# Altium PCB BreakoutBoard.PcbDoc
Units mil, origin at the board's own origin, x right, y up, seen from the top; angles counter-clockwise.
Board outline 1530 x 1110 mil, 2 copper layers (Top Layer, Bottom Layer); 13 components, 14 nets, 52 pads, 0 vias.
Unrouted connection lines stored in the file: 2.
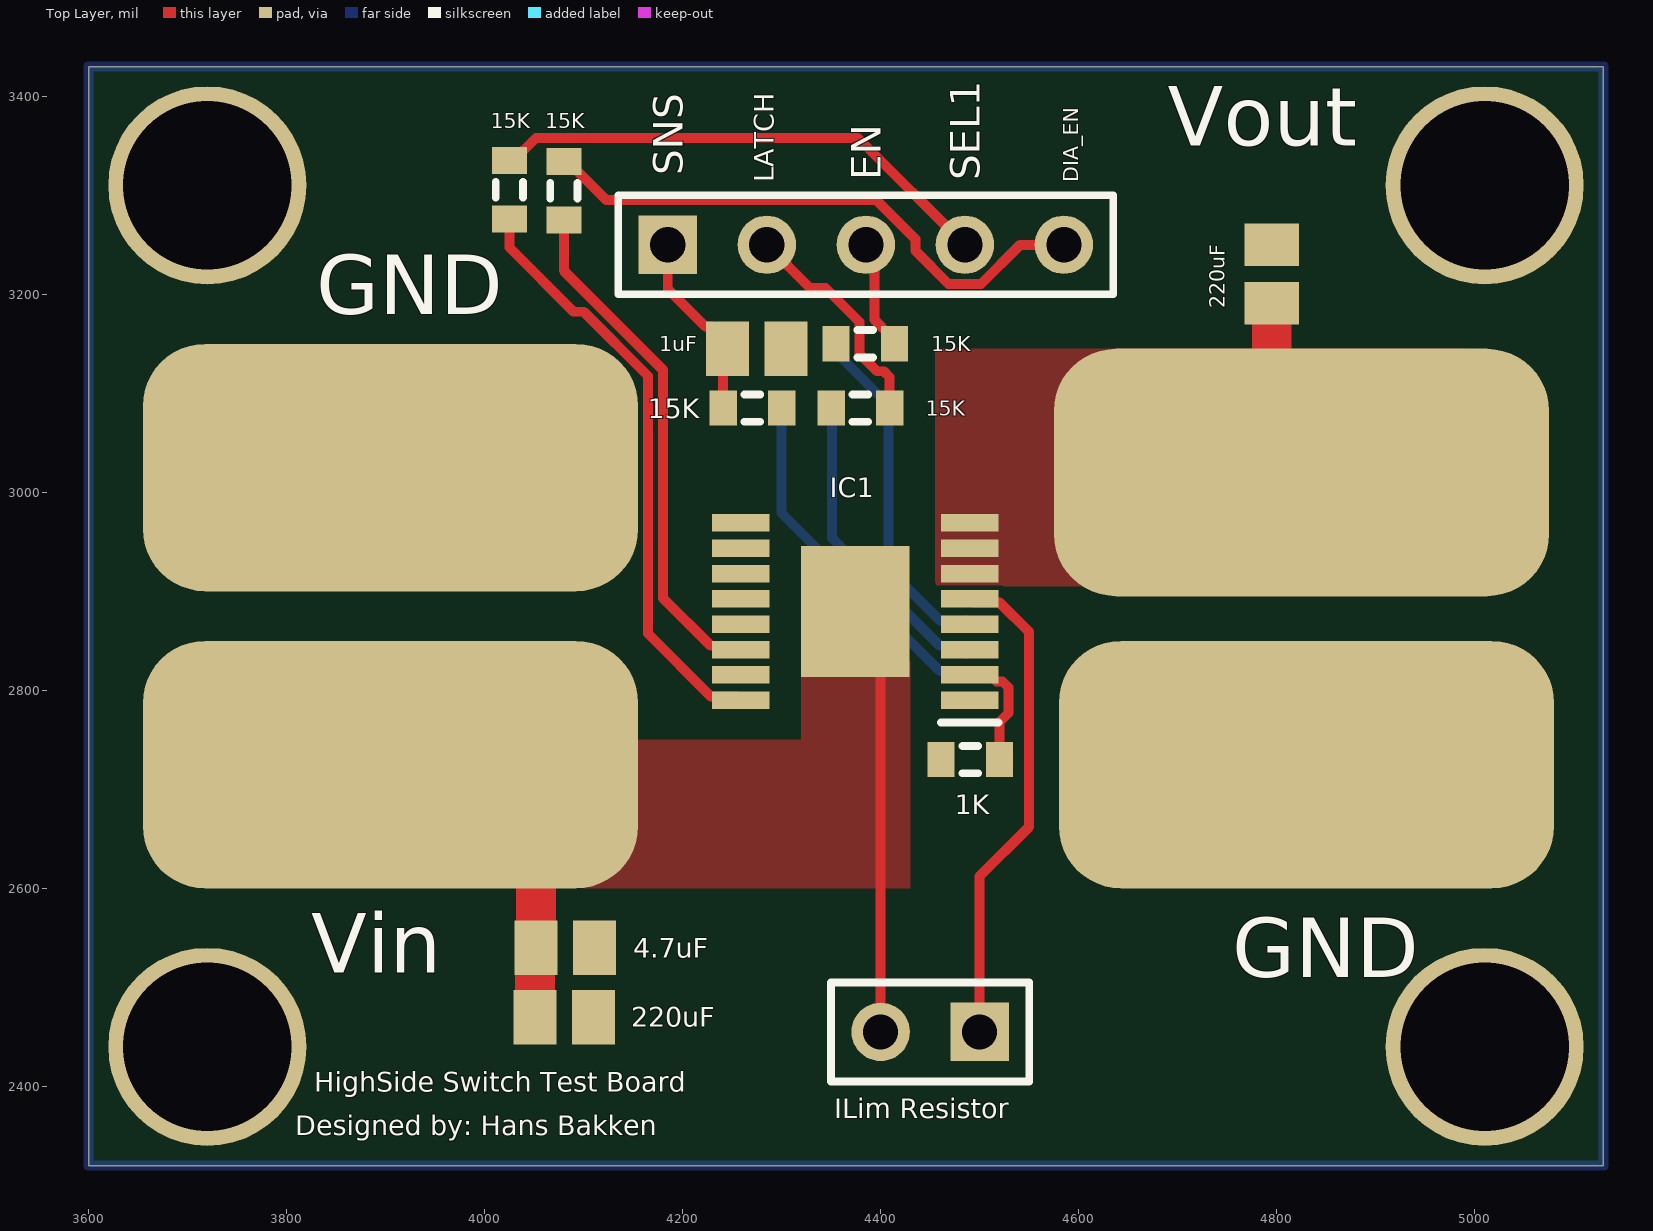
[diagram p0: Top Layer view]
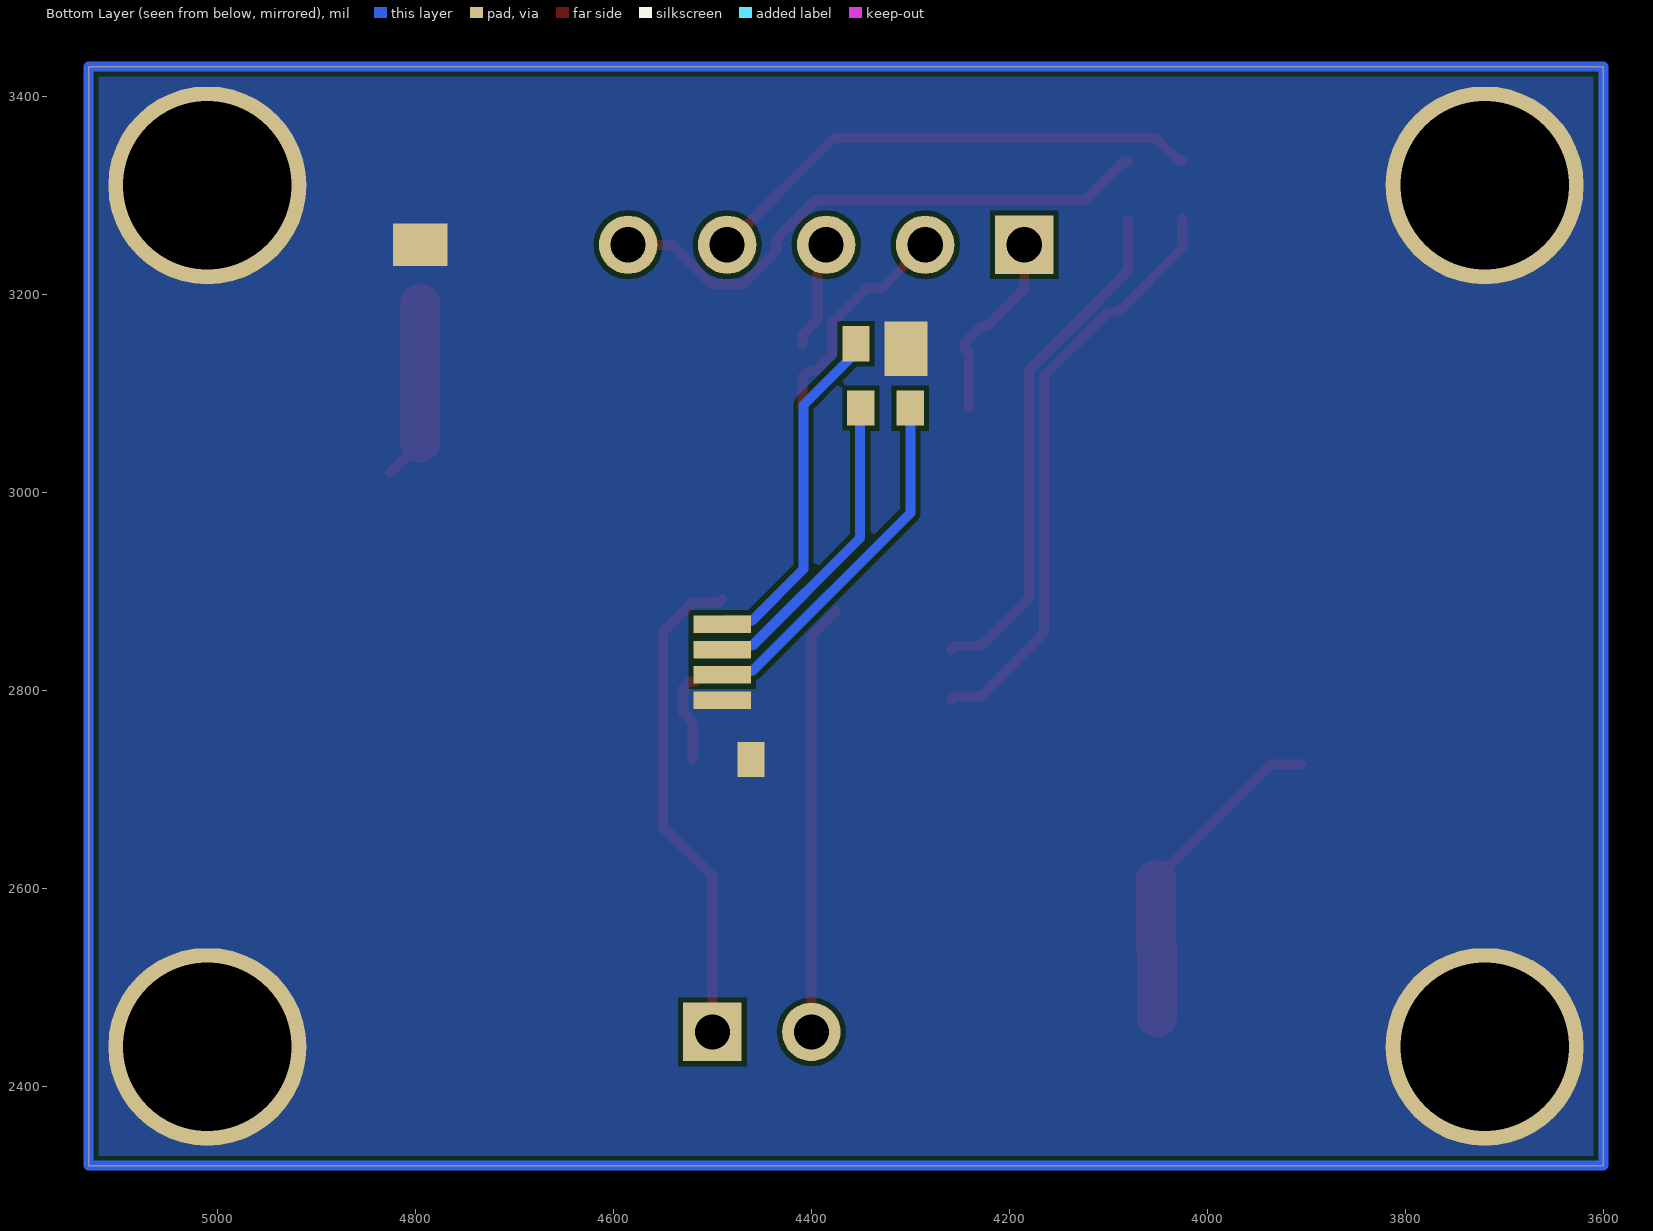
[diagram p1: Bottom Layer view, seen from below]

## Layer stack, top to bottom
Top Solder: solder mask 0.4, Solder Resist, Dk 3.5
Top Layer: signal copper 1.4
Dielectric 1: dielectric 12.6, FR-4, Dk 4.8
Bottom Layer: signal copper 1.4
Bottom Solder: solder mask 0.4, Solder Resist, Dk 3.5

## Board outline
3600,2320 3600,3430 5130,3430 5130,2320

## Design rules (kind name [scope] priority, off if disabled: settings)
Clearance [All] p1: gap=5 ignorepadtopadclearanceinfootprint=FALSE except(0: Arc-Hole Track-Hole SMDPad-Hole THPad-Hole Via-Hole Fill-Hole Poly-Hole Region-Hole Text-Hole)
DiffPairsRouting [All] p1: maxlimit=10 minlimit=5 mostfreqgap=10 toplayer_minwidth=5 toplayer_maxwidth=15 toplayer_prefwidth=15 bottomlayer_minwidth=5 bottomlayer_maxwidth=15 bottomlayer_prefwidth=15 maxuncoupledlength=500
PolygonConnect direct_2 [All vs IsNamedPolygon('VCC_L01_P004')] p1: thpad.connectstyle=Direct thpad.reliefconductorwidth=10 thpad.reliefentries=4 thpad.polygonreliefangle="90 Angle" thpad.airgapwidth=10 smdpad.connectstyle=Direct smdpad.reliefconductorwidth=10 smdpad.reliefentries=4 smdpad.polygonreliefangle="90 Angle" smdpad.airgapwidth=10 via.connectstyle=Relief via.reliefconductorwidth=10 via.reliefentries=4 via.polygonreliefangle="90 Angle" via.airgapwidth=10
PolygonConnect Direct_1 [All vs IsNamedPolygon('VOUT_L01_P003')] p2: thpad.connectstyle=Direct thpad.reliefconductorwidth=10 thpad.reliefentries=4 thpad.polygonreliefangle="90 Angle" thpad.airgapwidth=10 smdpad.connectstyle=Direct smdpad.reliefconductorwidth=10 smdpad.reliefentries=4 smdpad.polygonreliefangle="90 Angle" smdpad.airgapwidth=10 via.connectstyle=Relief via.reliefconductorwidth=10 via.reliefentries=4 via.polygonreliefangle="90 Angle" via.airgapwidth=10
PolygonConnect Direct [All vs IsNamedPolygon('VOUT_L01_P002')] p3: connectstyle=Direct reliefconductorwidth=10 reliefentries=4 polygonreliefangle="90 Angle" airgapwidth=10
PolygonConnect "Thick Connections" [All vs IsNamedPolygon('GND_L02_P001')] p4: connectstyle=Direct reliefconductorwidth=10 reliefentries=4 polygonreliefangle="90 Angle" airgapwidth=10
PolygonConnect PolygonConnect_1 [All vs IsNamedPolygon('GND_L02_P001')] p5: thpad.connectstyle=Relief thpad.reliefconductorwidth=10 thpad.reliefentries=4 thpad.polygonreliefangle="90 Angle" thpad.airgapwidth=0 smdpad.connectstyle=Relief smdpad.reliefconductorwidth=10 smdpad.reliefentries=4 smdpad.polygonreliefangle="90 Angle" smdpad.airgapwidth=0 via.connectstyle=Relief via.reliefconductorwidth=10 via.reliefentries=4 via.polygonreliefangle="90 Angle" via.airgapwidth=10
PolygonConnect y [All vs IsNamedPolygon('GND_L02_P001')] p6: thpad.connectstyle=Relief thpad.reliefconductorwidth=10 thpad.reliefentries=4 thpad.polygonreliefangle="90 Angle" thpad.airgapwidth=100 smdpad.connectstyle=Relief smdpad.reliefconductorwidth=10 smdpad.reliefentries=4 smdpad.polygonreliefangle="90 Angle" smdpad.airgapwidth=10 via.connectstyle=Relief via.reliefconductorwidth=10 via.reliefentries=4 via.polygonreliefangle="90 Angle" via.airgapwidth=10
PolygonConnect [All] p7: connectstyle=Relief reliefconductorwidth=10 reliefentries=4 polygonreliefangle="90 Angle" airgapwidth=10
RoutingVias [All] p1: holewidth=28 width=50 viastyle="Through Hole" minholewidth=28 minwidth=50 maxholewidth=28 maxwidth=50
SolderMaskExpansion [All] p1: expansion=4 istentingtop=FALSE
Width [All] p1: maxlimit=1000 minlimit=10 preferedwidth=10
29 further rules are at their usual default settings.

## Classes and differential pairs
component class LowCurrent: IC1

## Components (designator, comment, footprint, x,y, rotation, side; value= is the part's Value field where it differs from the comment)
1K "Res3" J1-0603#1 4490.47,2730 r0 top value=1K (schematic designator R2)
1uF "Cap" C0805#1 4275,3145 r0 top value=220nF (schematic designator C1)
4.7uF "Cap" C0805#2 4081.42,2540 r0 top value=4.7nF (schematic designator C2)
15K "Res3" J1-0603#2 4080,3304.53 r90 top value=15K (schematic designator R6)
15K "Res3" J1-0603#2 4025,3305.47 r90 top value=15K (schematic designator R5)
15K "Res3" J1-0603#1 4384.53,3150 r0 top value=15K (schematic designator R4)
15K "Res3" J1-0603#1 4379.53,3085 r0 top value=15K (schematic designator R3)
15K "Res3" J1-0603#3 4270.47,3085 r0 top value=15K (schematic designator R1)
220uF "Cap" C0805#1 4795,3220.47 r90 top value=220nF (schematic designator C4)
220uF "Cap" C0805#2 4080.47,2470 r0 top value=220nF (schematic designator C3)
IC1 "TPS1HB35AQPWPRQ1" SOP65P640X120-17N 4374.33,2879.57 r180 top
P2 "Microcontroller" HDR1X5 4185,3250 r0 top
P4 "PowerIn" HDR1X2 4500,2455 r180 top

## Footprints (in the part's own frame and the unit in brackets; to place one, negate y for a bottom-side part, rotate by r counter-clockwise, add the part's x,y. Pads: shape width x height; smd on the part's side, far side on the other; paste and mask are expansions set on the pad)
C0805#1 [mm] "Chip Capacitor, Body 2.0x1.3mm, IPC High Density"
  rect 1.1x1.4 smd: 1(-0.75,0)
  rect 1.1x1.4 all layers, no hole: 2(0.75,0)
  body extent -1.1,-0.72 1.1,0.72, height 1.4
C0805#2 [mm] "Chip Capacitor, Body 2.0x1.3mm, IPC High Density"
  rect 1.1x1.4 smd: 1(-0.75,0) 2(0.75,0)
  body extent -1.1,-0.72 1.1,0.72, height 1.4
HDR1X2 [mm] "Connector; Header; 2 Position"
  rect 1.5x1.5 hole 0.9: 1(0,0)
  round 1.5 hole 0.9: 2(2.54,0)
  silkscreen extent -1.27,-1.27 3.81,1.27
HDR1X5 [mm] "Connector; Header; 5 Position"
  rect 1.5x1.5 hole 0.9: 1(0,0)
  round 1.5 hole 0.9: 2(2.54,0) 3(5.08,0) 4(7.62,0) 5(10.16,0)
  silkscreen extent -1.27,-1.27 11.43,1.27
J1-0603#1 [mm] "Chip Resistor, Body 1.6x0.8mm, IPC High Density"
  rect 0.7x0.9 all layers, no hole: 1(-0.75,0)
  rect 0.7x0.9 smd: 2(0.75,0)
  silkscreen extent -0.2,-0.35 0.2,0.35, body extent -0.85,-0.48 0.85,0.48, height 0.9
J1-0603#2 [mm] "Chip Resistor, Body 1.6x0.8mm, IPC High Density"
  rect 0.7x0.9 smd: 1(-0.75,0) 2(0.75,0)
  silkscreen extent -0.2,-0.35 0.2,0.35, body extent -0.85,-0.48 0.85,0.48, height 0.9
J1-0603#3 [mm] "Chip Resistor, Body 1.6x0.8mm, IPC High Density"
  rect 0.7x0.9 smd: 1(-0.75,0)
  rect 0.7x0.9 all layers, no hole: 2(0.75,0)
  silkscreen extent -0.2,-0.35 0.2,0.35, body extent -0.85,-0.48 0.85,0.48, height 0.9
SOP65P640X120-17N [mm]
  rect 1.475x0.45 all layers, no hole: 1(-2.938,2.275) 2(-2.938,1.625) 3(-2.938,0.975) 4(-2.938,0.325)
  rect 1.475x0.45 smd: 5(-2.938,-0.325) 6(-2.938,-0.975) 7(-2.938,-1.625) 8(-2.938,-2.275) 9(2.938,-2.275) 10(2.938,-1.625) 11(2.938,-0.975) 12(2.938,-0.325) 13(2.938,0.325) 14(2.938,0.975) 15(2.938,1.625) 16(2.938,2.275)
  rect 2.78x3.37 smd: 17(0,0)
  silkscreen extent -3.67,2.85 -2.2,2.85, body extent -3.2,-2.5 3.2,2.5, height 1.2

## Part data
1K 15K 15K 15K 15K 15K: "Resistor", LatestRevisionDate=29-May-2009, LatestRevisionNote="IPC-7351 Footprint Added.", PackageDescription="Chip Resistor", PackageReference=J1-0603, Published=8-Jun-2000, Publisher="Altium Limited"
1uF 4.7uF 220uF 220uF: library part "Cap Pol3", "Polarized Capacitor (Surface Mount)", LatestRevisionDate=29-May-2009, LatestRevisionNote="IPC-7351 Footprint Added.", PackageDescription="Chip Capacitor", PackageReference=C0805, Published=8-Jun-2000, Publisher="Altium Limited"
IC1: "Integrated Circuit", Manufacturer_Name="Texas Instruments", Mouser Part Number=595-TPS1HB35AQPWPRQ1, Datasheet Link=https://www.ti.com/lit/ds/symlink/tps1hb35-q1.pdf?ts=1623228312677&ref_url=https%253A%252F%252Fwww.google.com%252F, Height=1.2mm, Manufacturer_Part_Number=TPS1HB35AQPWPRQ1, Mouser Price/Stock=https://www.mouser.co.uk/ProductDetail/Texas-Instruments/TPS1HB35AQPWPRQ1?qs=KUoIvG%2F9IlYFS2ZDCuDTOg%3D%3D
P2: library part "Header 5", "Header, 5-Pin", LatestRevisionDate=17-Jul-2002, LatestRevisionNote="Re-released for DXP Platform.", Publisher="Altium Limited"
P4: library part "Header 2", "Power Header", LatestRevisionDate=17-Jul-2002, LatestRevisionNote="Re-released for DXP Platform.", Publisher="Altium Limited"

## Free pads (board coordinates)
  rrect50% 500x250 smd: 3(3905,2725) 3(3905,3025) 3(4825,3020) 3(4830,2725)
  round 200 hole 170: 4(3720,2440) 4(3720,3310) 4(5010,2440) 4(5010,3310)

## Nets (pads, with @x,y where several pads share a name; then routed paths per layer and width w, separated by ;. In a path a pad name is that pad's centre, name@x,y a point inside that pad or via, vN(x,y) a via of type N, cw(c..) or ccw(c..) an arc to the next point about the centre after c; other vN are vias at no path point)
Device_SNS: 1K.2 15K.2@4300,3085 IC1.2 | length 484.6
  Top Layer w10: IC1.2 4510.18,2815.59 4516.91,2808.86 4523.18,2808.86 4529.04,2803 4529.04,2777 4520,2767.96 1K.2
  Bottom Layer w10: 15K.2@4300,3085 4300,2979.15 4459.7,2819.45 4486.14,2819.45 IC1.2
DIA_EN: 15K.1@4080,3275 IC1.14 | length 523.3
  Top Layer w10: 15K.1@4080,3275 4080,3223.74 4180,3123.74 4180,2893.4 4228.36,2845.04 4254.8,2845.04 IC1.14
GND: 1K.1 1uF.2 4.7uF.2 220uF.2 IC1.1 pad.3@3905,3025 pad.3@4830,2725 pad.4
Micro_SNS: 1uF.1 15K.1@4240.94,3085 P2.1 | length 195.4
  Top Layer w10: P2.1 4185,3205.47 4222.91,3167.56 4228.82,3167.56 4245.47,3150.91 1uF.1 4240.94,3140.47 15K.1@4240.94,3085
NetIC1_3: 15K.1@4350,3085 IC1.3 | length 332.4
  Top Layer w10: IC1.3@4486.14,2837.32 IC1.3
  Bottom Layer w10: 15K.1@4350.94,3095 4350.94,2953.79 4459.7,2845.04 4486.14,2845.04 IC1.3
NetIC1_4: 15K.1@4355,3150 IC1.4 | length 362.2
  Top Layer w10: IC1.4@4486.14,2870.63 IC1.4
  Bottom Layer w10: 15K.1@4350,3150 4350,3146.06 4407.8,3088.26 4407.8,2922.53 4459.7,2870.63 4486.14,2870.63 IC1.4
NetIC1_5: IC1.5 P4.1 | length 498.4
  Top Layer w10: IC1.5 4493.86,2888.5 4520.3,2888.5 4550,2858.81 4550,2662.26 4500,2612.26 P4.1
NetP2_2: 15K.2@4409.06,3085 P2.2 | length 229.7
  Top Layer w10: P2.2 4328.76,3206.24 4344.4,3206.24 4378.78,3171.86 4378.78,3139.64 4396.13,3122.28 4403.2,3122.28 4409.06,3116.43 15K.2@4409.06,3085
NetP2_3: 15K.2@4414.06,3150 P2.3 | length 110
  Top Layer w10: P2.3 4393.78,3241.22 4393.78,3174.21 4409.06,3158.94 15K.2@4409.06,3150
NetP2_4: 15K.2@4025,3335 P2.4 | length 514.1
  Top Layer w10: 15K.2@4025,3335 4028.94,3335 4051.77,3357.83 4377.17,3357.83 P2.4
NetP2_5: 15K.2@4080,3334.06 P2.5 | length 579.5
  Top Layer w10: 15K.2@4080,3334.06 4083.94,3334.06 4122.99,3295 4395.9,3295 4435,3255.9 4435,3244.1 4468.63,3210.47 4501.37,3210.47 4540.47,3249.57 4584.57,3249.57 P2.5
SEL1: 15K.1@4025,3275.94 IC1.16 | length 604.3
  Top Layer w10: 15K.1@4025,3275.94 4025,3247.17 4089.82,3182.35 4100.18,3182.35 4165,3117.53 4165,2857.22 4228.36,2793.86 4254.8,2793.86 IC1.16
VCC: 4.7uF.1 220uF.1@4050.94,2470 IC1.17 P4.2 pad.3@3905,2725 | length 769.9
  Top Layer w10: pad.3@3905,2725 3936.27,2725 pad.3@4051.89,2609.38 ; 4.7uF.1@4050.94,2539.06 4.7uF.1 ; IC1.17@4375,2880 4400,2855 P4.2
  Top Layer w40: 220uF.1@4050.94,2470 4.7uF.1@4050.94,2539.06 ; 4.7uF.1 pad.3@4051.89,2609.38
Vout: 220uF.1@4795,3190.94 IC1.6 IC1.7 IC1.8 pad.3@4825,3020 | length 183.4
  Top Layer w10: pad.3@4795,3050 pad.3@4825,3020
  Top Layer w40: pad.3@4795,3050 220uF.1@4795,3190.94
pads on no net: IC1.9 IC1.10 IC1.11 IC1.12 IC1.13 IC1.15
copper on no net: | length 5280
  Bottom Layer w10: 3600,2320 3600,3430 5130,3430 5130,2320 3600,2320

## Polygon pours and split planes (outlines as drawn)
Vout on Top Layer "VOUT_L01_P003" (solid, pour order 3): 4455,2905 4990,2905 4990,3145 4455,3145
VCC on Top Layer "VCC_L01_P004" (solid, pour order 4): 4320,2750 4320,2825 4325,2830 4430,2830 4430,2600 4100,2600 4100,2750
GND on Bottom Layer "GND_L02_P001" (solid, pour order 1): 3600,3430 5130,3430 5130,2320 3600,2320

## Other copper
Bottom Layer:
  region: 4625,2830
  region: 3670,2840

## Silkscreen, mask and mechanical layers (free items; w line width, h text height)
Top Overlay:
  text "Vout" at 4690,3350 h60
  text "SNS" at 4200,3320 h30 r90
  text "EN" at 4400,3315 h30 r90
  text "SEL1" at 4500,3315 h30 r90
  text "LATCH" at 4292,3313 h20 r90
  text "DIA_EN" at 4599.5,3313 h15 r90
  text "GND" at 3830,3180 h60
  text "Vin" at 3825,2515 h60
  text "GND" at 4755,2510 h60
  text "HighSide Switch Test Board" at 3828,2394.66 h20
  text "ILim Resistor" at 4353,2368 h20
  text "Designed by: Hans Bakken" at 3809,2350.66 h20